# EAGLE board carpcb_v6 (EAGLE 9.7.0)
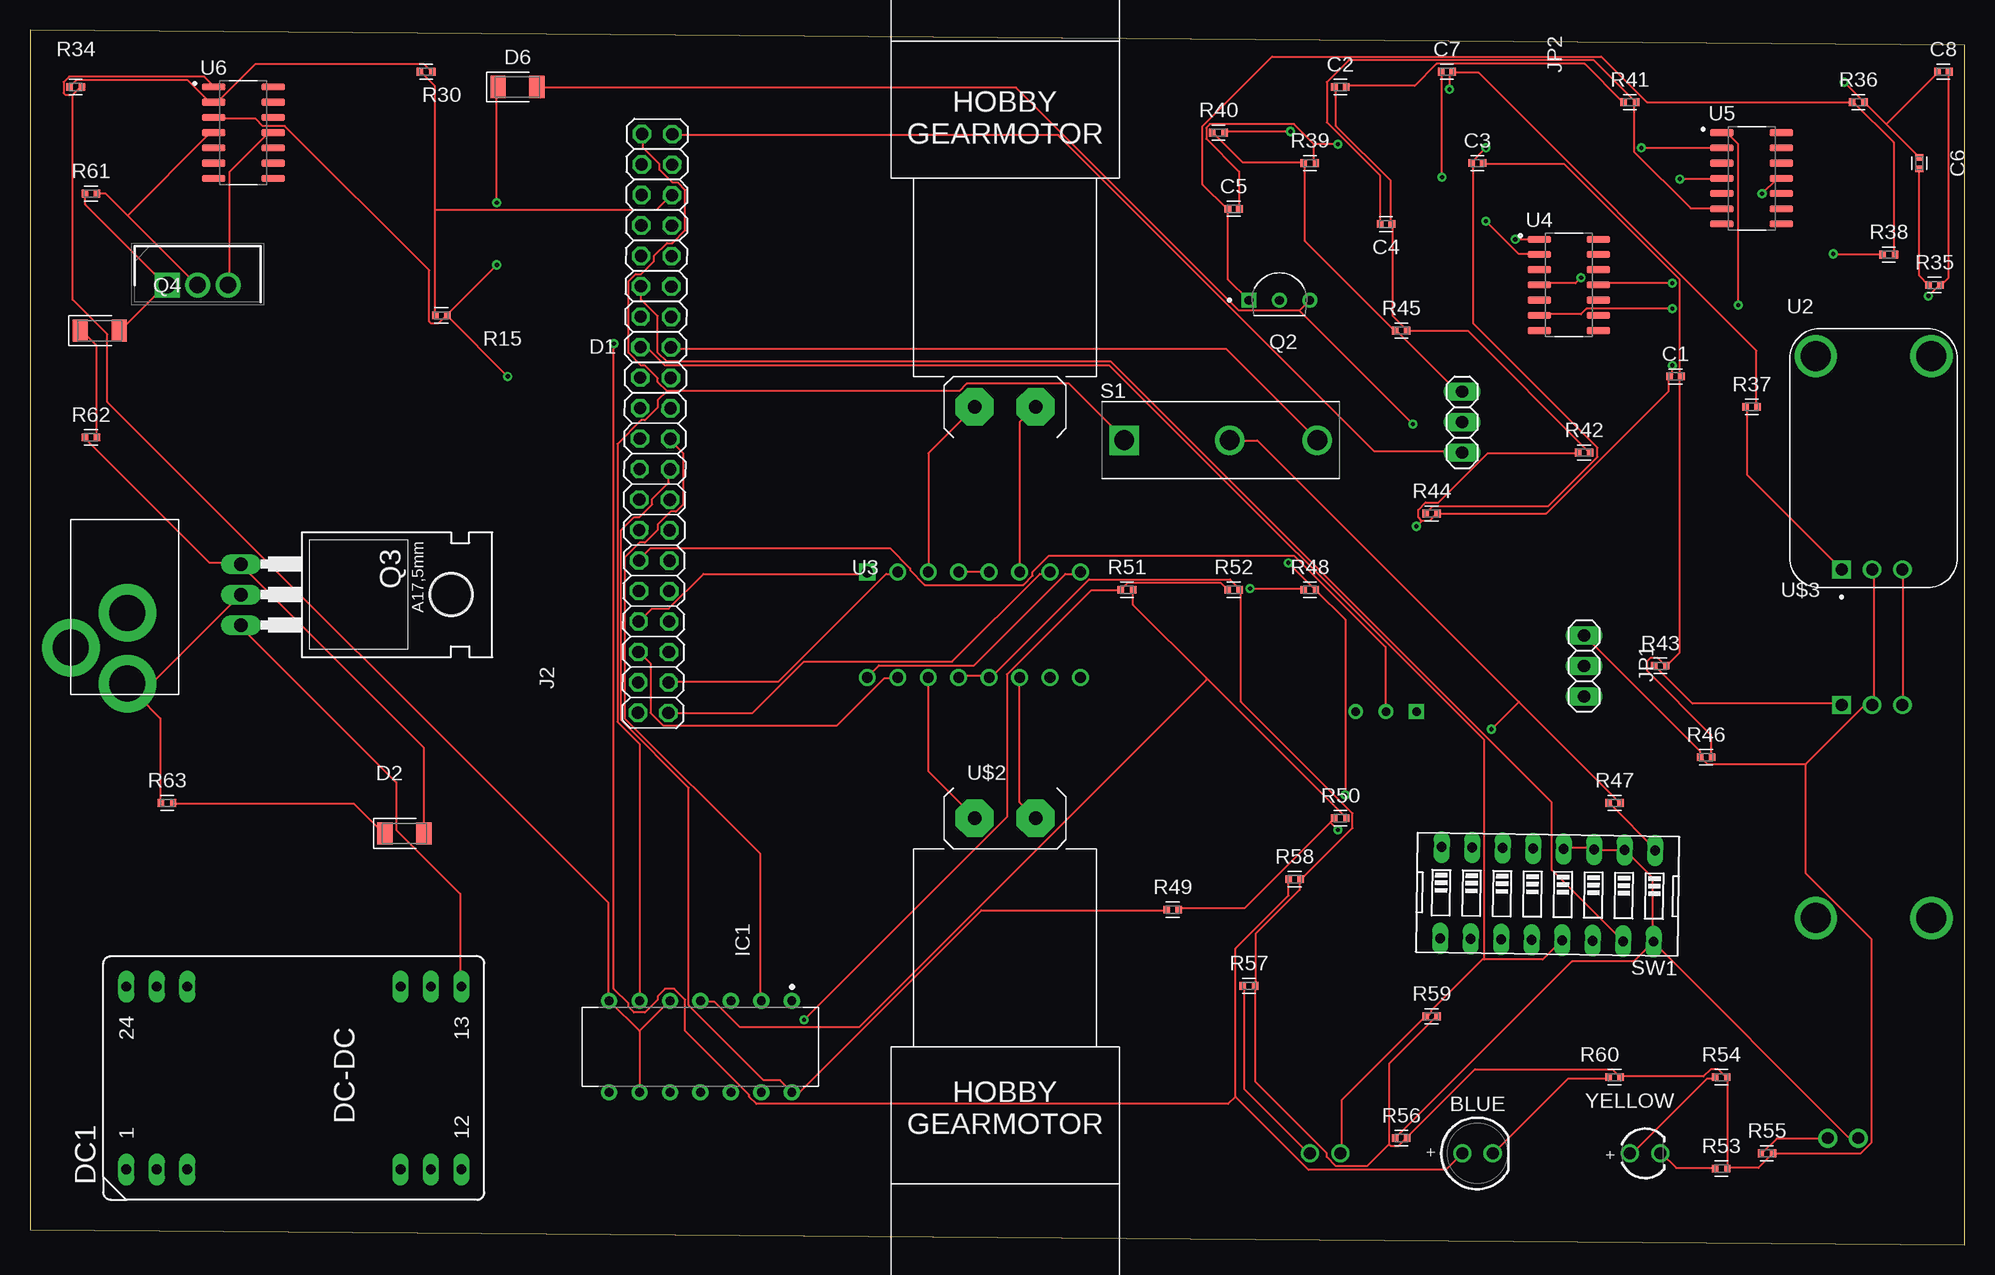
[diagram p0: board, top side]
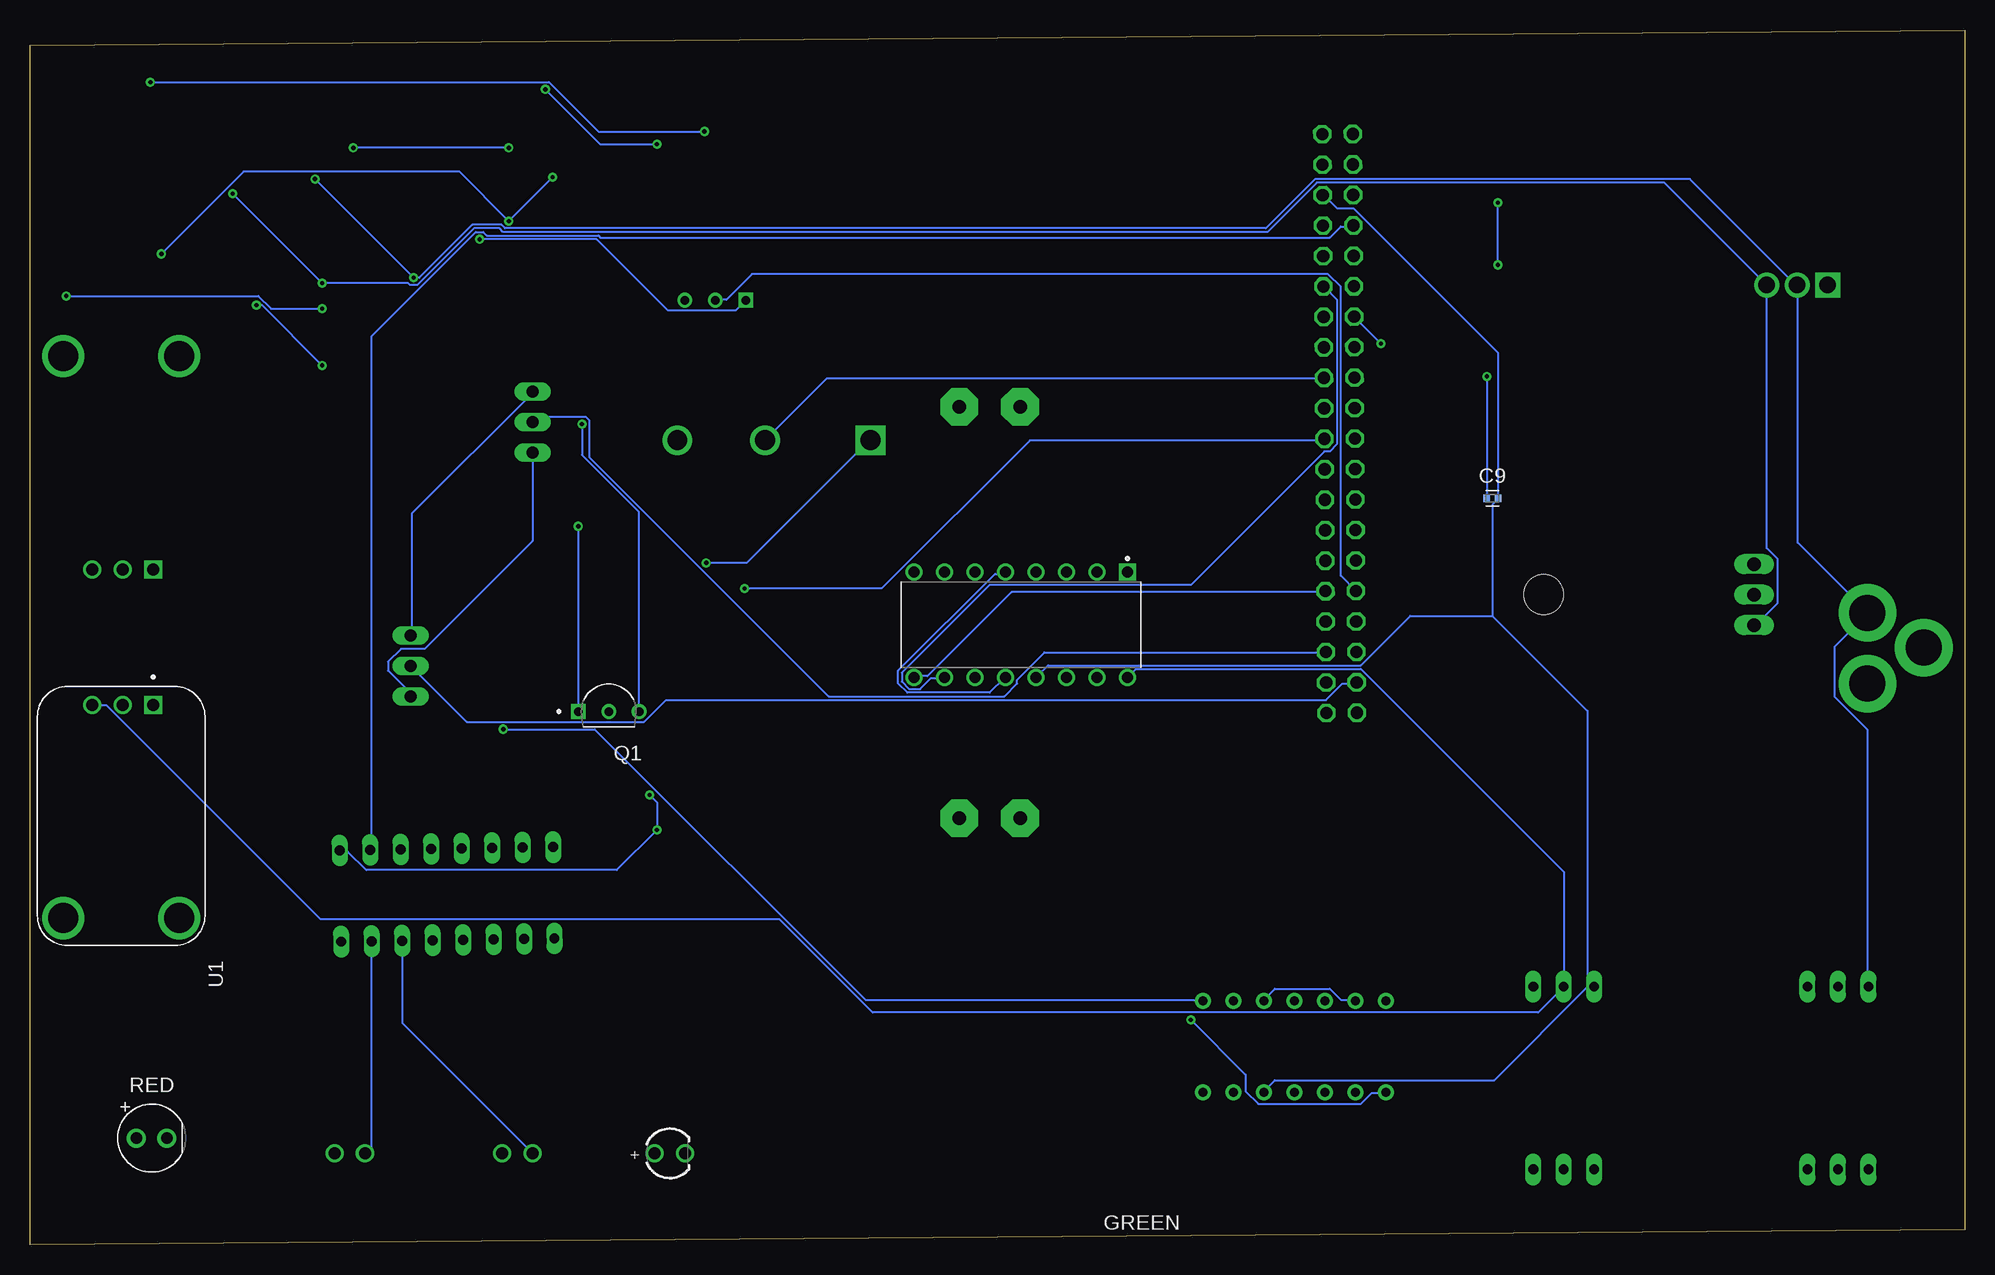
[diagram p1: board, bottom side, seen from below]

Size 161.27 x 101.27 mm. Coordinates in mm from the lower left corner, seen from the top.
Outline: 0,1.27 161.27,0 161.27,100 0,101.27 0,1.27
Copper layers (1*16): Top 0.035mm / dielectric 1.5mm / Bottom 0.035mm
Design rules "Fusion Electronics Design Rules": minimum track width 6mil, minimum drill 0.35mm, track to track 6mil, track to pad 6mil, pad to pad 6mil, via to via 6mil, smd to smd 6mil, copper to edge 40mil, drill to drill 6mil, minimum pad ring 10mil, minimum via ring 8mil, stop-mask expansion 4mil, vias tented up to drill 0mil, thermal gap 10mil

## Footprints (pad centres in the part's own frame; a part is rotated, then mirrored left to right if it is on the bottom)
WL-TMRC_5MM = drill 1: 1 -1.27,0; 2 1.27,0
CAPC1005X60 = smd 0.56 x 0.629: 1 -0.485,0; 2 0.485,0
DIOMELF3516 = smd 1.275 x 1.85: 1 -1.62,0; 2 1.62,0
CMK = drill 0.813 long: 1 -7.62,13.97; 2 -7.62,11.43; 3 -7.62,8.89; 10 -7.62,-8.89; 11 -7.62,-11.43; 12 -7.62,-13.97; 13 7.62,-13.97; 14 7.62,-11.43; 15 7.62,-8.89; 22 7.62,8.89; 23 7.62,11.43; 24 7.62,13.97
WL-TMRC_3MM = drill 1: 1 -1.27,0; 2 1.27,0
DIP762W53P254L1969H508Q14B = drill 0.743 pad 1.343: 1 -3.81,7.62; 2 -3.81,5.08; 3 -3.81,2.54; 4 -3.81,0; 5 -3.81,-2.54; 6 -3.81,-5.08; 7 -3.81,-7.62; 8 3.81,-7.62; 9 3.81,-5.08; 10 3.81,-2.54; 11 3.81,0; 12 3.81,2.54; 13 3.81,5.08; 14 3.81,7.62
2X20 = drill 1.016 octagon: 1 -24.13,-1.27; 2 -24.13,1.27; 3 -21.59,-1.27; 4 -21.59,1.27; 5 -19.05,-1.27; 6 -19.05,1.27; 7 -16.51,-1.27; 8 -16.51,1.27; 9 -13.97,-1.27; 10 -13.97,1.27; 11 -11.43,-1.27; 12 -11.43,1.27; 13 -8.89,-1.27; 14 -8.89,1.27; 15 -6.35,-1.27; 16 -6.35,1.27; 17 -3.81,-1.27; 18 -3.81,1.27; 19 -1.27,-1.27; 20 -1.27,1.27; 21 1.27,-1.27; 22 1.27,1.27; 23 3.81,-1.27; 24 3.81,1.27; 25 6.35,-1.27; 26 6.35,1.27; 27 8.89,-1.27; 28 8.89,1.27; 29 11.43,-1.27; 30 11.43,1.27; 31 13.97,-1.27; 32 13.97,1.27; 33 16.51,-1.27; 34 16.51,1.27; 35 19.05,-1.27; 36 19.05,1.27; 37 21.59,-1.27; 38 21.59,1.27; 39 24.13,-1.27; 40 24.13,1.27
1X03 = drill 1.016 long: 1 -2.54,0; 2 0,0; 3 2.54,0
TO92254P458H750-3 = drill 0.72 square: 1 -2.54,0 | drill 0.72: 2 0,0; 3 2.54,0
TO220BH = drill 1.118 long: D 0,-6.35; G -2.54,-6.35; S 2.54,-6.35 | hole 3.302: 0,11.176
TO254P465X1024X2050-3P = drill 1.39 pad 2.085 square: 1 0,0 | drill 1.39 pad 2.085: 2 2.54,0; 3 5.08,0
RESC1005X40 = smd 0.535 x 0.644: 1 -0.507,0; 2 0.507,0
LEDRD254W60D565H860B_R = drill 0.981 pad 1.581: A -1.27,0; C 1.27,0
SW_MS0850502F030P1A = drill 1.65 square: 1 0,0 | drill 1.65: 2 16.1,0; 3 8.8,0
EDG-08 = drill 0.813 long: 1 -8.89,-3.81; 2 -6.35,-3.81; 3 -3.81,-3.81; 4 -1.27,-3.81; 5 1.27,-3.81; 6 3.81,-3.81; 7 6.35,-3.81; 8 8.89,-3.81; 9 8.89,3.81; 10 6.35,3.81; 11 3.81,3.81; 12 1.27,3.81; 13 -1.27,3.81; 14 -3.81,3.81; 15 -6.35,3.81; 16 -8.89,3.81
MODULE_1063 = drill 1 square: 1 -2.667,-9.271 | drill 1: 2 -0.127,-9.271; 3 2.413,-9.271 | drill 2.5: S1 -4.826,8.509; S2 4.826,8.509
DIP880W50P254L2000H510Q16 = drill 0.9 pad 1.25 square: 1 -4.4,8.89 | drill 0.9 pad 1.25: 2 -4.4,6.35; 3 -4.4,3.81; 4 -4.4,1.27; 5 -4.4,-1.27; 6 -4.4,-3.81; 7 -4.4,-6.35; 8 -4.4,-8.89; 9 4.4,-8.89; 10 4.4,-6.35; 11 4.4,-3.81; 12 4.4,-1.27; 13 4.4,1.27; 14 4.4,3.81; 15 4.4,6.35; 16 4.4,8.89
SOIC127P600X175-14N = smd 1.97 x 0.6: 1 -2.475,3.81; 2 -2.475,2.54; 3 -2.475,1.27; 4 -2.475,0; 5 -2.475,-1.27; 6 -2.475,-2.54; 7 -2.475,-3.81; 8 2.475,-3.81; 9 2.475,-2.54; 10 2.475,-1.27; 11 2.475,0; 12 2.475,1.27; 13 2.475,2.54; 14 2.475,3.81
PJ-102A = drill 3 pad 4.8: RING 0.1,-3.39; RING_SW -4.6,-6.29; TIP 0.1,-9.29
DG01D = drill 1.118 pad 3.15 octagon: + 2.54,0; - -2.54,0

## Placement (x,y rotation side)
BLUE  WL-TMRC_5MM_WITHOUTSTOPPER  [WL-TMRC_5MM]  120.65,7.62 0 top
C1  1  [CAPC1005X60]  137.16,72.39 0 top
C2  1  [CAPC1005X60]  109.22,96.52 0 top
C3  1  [CAPC1005X60]  120.65,90.17 0 top
C4  1  [CAPC1005X60]  113.03,85.09 180 top
C5  1  [CAPC1005X60]  100.33,86.36 0 top
C6  1  [CAPC1005X60]  157.48,90.17 270 top
C7  1  [CAPC1005X60]  118.11,97.79 0 top
C8  1  [CAPC1005X60]  159.49,97.79 0 top
C9  1  [CAPC1005X60]  39.37,62.23 0 bottom
D1  DIODE_DO-213AA(SOD-80)  [DIOMELF3516]  5.81,76.2 0 top
D2  DIODE_DO-213AA(SOD-80)  [DIOMELF3516]  31.21,34.29 0 top
D6  DIODE_DO-213AA(SOD-80)  [DIOMELF3516]  40.64,96.52 0 top
DC1  1  [CMK]  22,13.9 90 top
GREEN  WL-TMRC_3MM_WITHOUTSTOPPER  [WL-TMRC_3MM]  107.95,7.62 0 bottom
IC1  LM339_PDIP  [DIP762W53P254L1969H508Q14B]  55.88,16.51 270 top
J2  PiHeaderM  [2X20]  52.11,68.47 269.6 top
JP1  PINHD-1X3  [1X03]  129.54,48.26 90 top
JP2  PINHD-1X3  [1X03]  119.38,68.58 90 top
Q1  2N7000  [TO92254P458H750-3]  113.03,44.45 0 bottom
Q2  2N7000  [TO92254P458H750-3]  104.14,78.74 0 top
Q3  IRF4905  [TO220BH]  23.92,54.2 270 top
Q4  IRFZ34PBF  [TO254P465X1024X2050-3P]  11.43,80.01 0 top
R15  1  [RESC1005X40]  34.29,77.47 0 top
R30  1  [RESC1005X40]  33.02,97.79 0 top
R34  1  [RESC1005X40]  3.81,96.52 0 top
R35  1  [RESC1005X40]  158.75,80.01 0 top
R36  1  [RESC1005X40]  152.4,95.25 0 top
R37  1  [RESC1005X40]  143.51,69.85 0 top
R38  1  [RESC1005X40]  154.94,82.55 0 top
R39  1  [RESC1005X40]  106.68,90.17 0 top
R40  1  [RESC1005X40]  99.06,92.71 0 top
R41  1  [RESC1005X40]  133.35,95.25 0 top
R42  1  [RESC1005X40]  129.54,66.04 0 top
R43  1  [RESC1005X40]  135.89,48.26 0 top
R44  1  [RESC1005X40]  116.84,60.96 0 top
R45  1  [RESC1005X40]  114.3,76.2 0 top
R46  1  [RESC1005X40]  139.7,40.64 0 top
R47  1  [RESC1005X40]  132.08,36.83 0 top
R48  1  [RESC1005X40]  106.68,54.61 0 top
R49  1  [RESC1005X40]  95.25,27.94 0 top
R50  1  [RESC1005X40]  109.22,35.56 0 top
R51  1  [RESC1005X40]  91.44,54.61 0 top
R52  1  [RESC1005X40]  100.33,54.61 0 top
R53  1  [RESC1005X40]  140.97,6.35 0 top
R54  1  [RESC1005X40]  140.97,13.97 0 top
R55  1  [RESC1005X40]  144.78,7.62 0 top
R56  1  [RESC1005X40]  114.3,8.89 0 top
R57  1  [RESC1005X40]  101.6,21.59 0 top
R58  1  [RESC1005X40]  105.41,30.48 0 top
R59  1  [RESC1005X40]  116.84,19.05 0 top
R60  1  [RESC1005X40]  132.08,13.97 0 top
R61  1  [RESC1005X40]  5.08,87.63 0 top
R62  1  [RESC1005X40]  5.08,67.31 0 top
R63  1  [RESC1005X40]  11.43,36.83 0 top
RED  LED_RADIALRED  [LEDRD254W60D565H860B_R]  151.13,8.89 0 bottom
S1  MS0850502F030P1A  [SW_MS0850502F030P1A]  91.2,67.07 0 top
SW1  1  [EDG-08]  126.5,29.21 179.1 top
U1  1063  [MODULE_1063]  153.67,35.74 180 bottom
U2  1063  [MODULE_1063]  153.67,65.57 0 top
U3  L293D  [DIP880W50P254L2000H510Q16]  78.68,51.68 270 bottom
U4  TL084CD  [SOIC127P600X175-14N]  128.27,80.02 0 top
U5  TL084CD  [SOIC127P600X175-14N]  143.51,88.9 0 top
U6  TL084CD  [SOIC127P600X175-14N]  17.78,92.71 0 top
U$1  2.1MMJACKTHM  [PJ-102A]  8.02,56.07 0 top
U$2  MOTOR_DG01D  [DG01D]  81.28,35.56 0 top
U$3  MOTOR_DG01D  [DG01D]  81.28,69.85 180 top
YELLOW  WL-TMRC_3MM_WITHOUTSTOPPER  [WL-TMRC_3MM]  134.62,7.62 0 top

## Library data of the parts
BLUE = WL-TMRC_5MM; AVAILABILITY: In Stock; CHECK_PRICES: https://www.snapeda.com/parts/151051BS04000/Wurth+Electronics/view-part/?ref=eda; DESCRIPTION: 5mm, Blue Typ.(@20mA): 470nm, 500mcd, 3.2V, 40° GaN; MF: Wurth Electronics; MP: 151051BS04000; PACKAGE: Package; PRICE: None; SNAPEDA_LINK: https://www.snapeda.com/parts/151051BS04000/Wurth+Electronics/view-part/?ref=snap
C1-C9 = Tinkercad; CATEGORY: Capacitor
D1 D2 D6 = Diode; CATEGORY: Diode; DESCRIPTION: Generic diode Surface Mount DO-213AA(SOD-80); PACKAGE_SIZE: SOD-80; PACKAGE_TYPE: SMD; SUBCATEGORY: Rectifiers
DC1 = dc-dc-converter
GREEN = WL-TMRC_3MM; AVAILABILITY: In Stock; CHECK_PRICES: https://www.snapeda.com/parts/151031VS06000/Wurth+Electronics/view-part/?ref=eda; DESCRIPTION: 3mm Bright Green Typ (@20mA) 568nm, 30mcd, 2.2V, 60° GaP/GaP; MF: Wurth Electronics; MP: 151031VS06000; PACKAGE: Radial Würth Elektronik; PRICE: None; SNAPEDA_LINK: https://www.snapeda.com/parts/151031VS06000/Wurth+Electronics/view-part/?ref=snap
IC1 U$2 U$3 = Tinkercad
J2 U$1 = adafruit
JP1 JP2 = Connector; CATEGORY: Headers; DESCRIPTION: Header-Straight-3 Position; PACKAGE_TYPE: THT; PITCH: 0.100" (2.54mm); SUBCATEGORY: Headers-Male Pins; TYPE: Board to Board or Cable-Unshrouded-Through Hole-Straight
Q1 Q2 = 2N7000; AVAILABILITY: In Stock; CHECK_PRICES: https://www.snapeda.com/parts/2N7000/Diotec/view-part/?ref=eda; DESCRIPTION: MOSFET, TO-92, N, 60V, 0.2A, 5Ω, 150°C; MF: Diotec Semiconductor; MP: 2N7000; PACKAGE: TO-92 Diotec; PRICE: None; SNAPEDA_LINK: https://www.snapeda.com/parts/2N7000/Diotec/view-part/?ref=snap
Q3 = IRF4905; AVAILABILITY: Not in stock; CHECK_PRICES: https://www.snapeda.com/parts/IRF4905/Infineon/view-part/?ref=eda; DESCRIPTION: P-Channel 55 V 74A (Tc) 200W (Tc) Through Hole TO-220AB; MF: Infineon Technologies; MP: IRF4905; PACKAGE: TO-220 Infineon; PRICE: None; SNAPEDA_LINK: https://www.snapeda.com/parts/IRF4905/Infineon/view-part/?ref=snap
Q4 = IRFZ34PBF; ARROW_PART_NUMBER: IRFZ34PBF; ARROW_PRICE-STOCK: https://www.arrow.com/en/products/irfz34pbf/vishay?region=nac; DESCRIPTION: Trans MOSFET N-CH 60V 30A; HEIGHT: 4.65mm; MANUFACTURER_NAME: Vishay; MANUFACTURER_PART_NUMBER: IRFZ34PBF; MOUSER_PART_NUMBER: 844-IRFZ34PBF; MOUSER_PRICE-STOCK: https://www.mouser.co.uk/ProductDetail/Vishay-Semiconductors/IRFZ34PBF?qs=I1ZA2VTqfvRg%2FcYzigS1jg%3D%3D
R15 R30 R34-R63 = Resistor; CATEGORY: Resistors; DESCRIPTION: Chip Resistor 1.05 X 0.54 X 0.40 mm body 0402(1005-METRIC) Package; PACKAGE_SIZE: 0402; PACKAGE_TYPE: SMD
RED = Opto-Electronic; CATEGORY: Optoelectronics; COLOR: Red; DESCRIPTION: Radial LED (Round) 2.54 mm pitch 5.65 mm body diameter 8.60 mm body height Red; PACKAGE_SIZE: 5mm; PACKAGE_TYPE: THT; SUBCATEGORY: LED; TYPE: Round
S1 = MS0850502F030P1A; AVAILABILITY: In Stock; CHECK_PRICES: https://www.snapeda.com/parts/MS0850502F030P1A/E-Switch/view-part/?ref=eda; DESCRIPTION: Snap Action Switch, SPDT, ON-MOM, MS Series, Straight Lever, 5A, 125VAC, PC Pin | E-Switch MS0850502F030P1A; MF: E-Switch; MP: MS0850502F030P1A; PACKAGE: None; PRICE: None; SNAPEDA_LINK: https://www.snapeda.com/parts/MS0850502F030P1A/E-Switch/view-part/?ref=snap
SW1 = special
U1 U2 = 1063; AVAILABILITY: In Stock; CHECK_PRICES: https://www.snapeda.com/parts/1063/Adafruit+Industries/view-part/?ref=eda; DESCRIPTION: Electret Microphone Amplifier - MAX4466 with Adjustable Gain | Adafruit Industries 1063; MF: Adafruit; MP: 1063; PACKAGE: None; PRICE: None; SNAPEDA_LINK: https://www.snapeda.com/parts/1063/Adafruit+Industries/view-part/?ref=snap
U3 = L293D; AVAILABILITY: In Stock; CHECK_PRICES: https://www.snapeda.com/parts/L293D/STMicroelectronics/view-part/?ref=eda; DESCRIPTION: Bipolar Motor Driver - Parallel 16-PowerDIP; MF: STMicroelectronics; MP: L293D; PACKAGE: DIP-16 STMicroelectronics; PRICE: None; SNAPEDA_LINK: https://www.snapeda.com/parts/L293D/STMicroelectronics/view-part/?ref=snap
U4-U6 = TL084CD; CHECK_PRICES: https://www.snapeda.com/parts/TL084CD/Texas+Instruments/view-part/?ref=eda; DESCRIPTION: Quad, 30-V, 3-MHz, 13-V/µs slew rate, In to V+, JFET-input op amp; DIGIKEY_PART_NUMBER: 296-1285-5-ND; MF: Texas Instruments; MP: TL084CD; PACKAGE: SOIC-14 Texas Instruments; SNAPEDA_LINK: https://www.snapeda.com/parts/TL084CD/Texas+Instruments/view-part/?ref=snap
YELLOW = WL-TMRC_3MM-2; AVAILABILITY: In Stock; CHECK_PRICES: https://www.snapeda.com/parts/151031YS06000/Wurth+Electronics/view-part/?ref=eda; DESCRIPTION: 3mm, Yellow Typ (@20mA) 590nm, 110mcd, 2.0V, 60° AlInGaP; MF: Wurth Electronics; MP: 151031YS06000; PACKAGE: Radial Würth Elektronik; PRICE: None; SNAPEDA_LINK: https://www.snapeda.com/parts/151031YS06000/Wurth+Electronics/view-part/?ref=snap

## Nets
3V3GPIO*: IC1.3 IC1.6 J2.1 R47.1 R48.2 R49.2 R50.1 S1.1 SW1.1
5VGPIO*: J2.2 JP1.1 JP2.1
GND*GPIO1: C9.2 DC1.15 IC1.12 J2.6 JP1.3 JP2.3 R15.1 R30.1 R39.1 R40.1 R45.1 R46.1 R52.2 R53.2 R54.2 R55.2 R56.2 R57.2 R58.2 R59.2 R60.2 U1.2 U2.2 U3.4 U3.5 U3.12 U3.13
GPIO4*: J2.7 R56.1 RED.A SW1.2 SW1.3 SW1.4 SW1.16
GPIO5*: J2.29 Q1.2
GPIO6*: J2.31 Q2.2
GPIO8*: IC1.14 J2.24 R49.1
GPIO12*: J2.32 U3.9
GPIO13*: J2.33 U3.1
GPIO16*: J2.36 JP2.2
GPIO17*: J2.11 R54.1 SW1.15 YELLOW.1
GPIO18*: J2.12 U3.10
GPIO19*: J2.35 U3.15
GPIO20*: J2.38 U3.2
GPIO21*: J2.40 U3.7
GPIO22*: GREEN.1 J2.15 R59.1 SW1.13
GPIO23*: J2.16 S1.2
GPIO24*: IC1.1 J2.18 R47.2 S1.3
GPIO25*: IC1.2 J2.22 R48.1
GPIO26*: J2.37 JP1.2
GPIO27*: BLUE.1 J2.13 R58.1 SW1.14
N$1: D1.2 Q4.1 R61.1
N$2: D1.1 R62.2
N$3: D2.2 Q3.G R62.1
N$4: D2.1 R63.2
N$5: Q3.D R63.1 U$1.TIP
N$6: U3.11 U$2.+
N$7: U3.3 U$3.+
N$8: C1.2 C3.2 R43.2 R46.2
N$9: DC1.14 U1.3 U2.3 U3.8 U3.16
N$12: C3.1 R44.1 U5.2
N$13: C2.1 C4.1 R42.2 R45.2
N$14: C2.2 R41.1
N$15: C1.1 Q1.1 R42.1 R44.2 U5.1
N$16: C4.2 R41.2 U5.6
N$17: R55.1 RED.C
N$18: R43.1 U1.1
N$19: C5.2 C7.2 R37.2 R39.2
N$20: C7.1 R38.1 U4.2
N$21: C6.1 C8.1 R36.2 R40.2
N$22: C6.2 R35.1
N$23: C5.1 Q2.1 R36.1 R38.2 U4.1
N$24: C8.2 R35.2 U4.6
N$25: R53.1 YELLOW.2
N$26: R37.1 U2.1
N$27: C9.1 D6.1 R15.2 U6.3
N$28: GREEN.2 R57.1
N$29: D6.2 Q1.3 Q2.3
N$30: BLUE.2 R60.1
N$31: IC1.4 R50.2 R51.2
N$32: IC1.8 R51.1 R52.1
N$33: U3.6 U$3.-
N$34: R30.2 R34.1 U6.2
N$35: IC1.5 IC1.7 IC1.9 R34.2 U6.1
N$36: U3.14 U$2.-
VCC+12: DC1.24 Q4.2 R61.2 U4.4 U5.4 U6.4 U$1.RING
VCC-12: DC1.13 Q3.S Q4.3 U4.11 U5.11 U6.11

## Tracks (layer width: path | path; a pad name or v marks a point on that pad's centre or on a via)
3V3GPIO*  (via drill 0.35)
  Top 0.152: R47.1 131.72,36.73 135.53,32.92 SW1.1 | 108.41,35.2 108.71,35.51 R50.1 | 108.41,35.2 101.24,28.04 95.76,28.04 R49.2 | 108.41,35.2 v109.02,34.59 | v104.9,56.84 107.04,54.71 R48.2 107.19,54.56 109.63,52.12 v109.63,37.49 | 53.09,71.17 52.32,71.93 52.32,72.24 51.26,73.3 50.95,73.3 49.89,74.37 49.89,80.31 50.5,80.92 50.95,80.92 52.02,81.99 52.02,82.45 53.09,83.52 53.54,83.52 54.61,84.58 54.61,87.94 54,88.54 53.54,88.54 52.48,89.61 52.48,90.07 51.11,91.44 51.11,92.51 J2.1 | 53.09,71.17 77.47,71.17 78.08,71.78 86.61,71.78 91.19,67.21 S1.1 | 53.09,71.17 52.32,70.41 52.32,69.8 51.26,68.73 50.95,68.73 48.97,66.75 48.97,43.59 50.8,41.76 50.8,20.42 IC1.6
  Bottom 0.152: SW1.1 135.38,32.77 134.77,32.77 133.25,31.24 112.37,31.24 v109.02,34.59 109.02,36.88 v109.63,37.49 | IC1.6 50.8,20.42 52.02,20.42 52.93,21.34 57.51,21.34 58.42,20.42 IC1.3 | v104.9,56.84 101.55,56.84 91.34,67.06 S1.1
5VGPIO*
  Top 0.152: J2.2 53.7,92.51 85.7,92.51 112.06,66.14 119.38,66.14 JP2.1
  Bottom 0.152: JP1.1 129.59,45.72 129.59,46.02 131.42,47.85 131.42,48.62 130.35,49.68 128.37,49.68 119.38,58.67 119.38,65.99 JP2.1
GND*GPIO1
  Top 0.152: 33.73,86.26 33.73,96.62 32.66,97.69 R30.1 | 33.73,86.26 33.73,77.57 R15.1 | 33.73,86.26 52.17,86.26 53.39,87.48 J2.6 | U2.2 153.67,56.24 153.67,45.11 U1.2 153.52,44.96 152.91,44.96 148.03,40.08 | JP1.3 129.59,50.75 139.19,41.15 139.19,40.69 R46.1 139.34,40.54 139.8,40.08 148.03,40.08 | R40.1 98.65,92.66 101.09,90.22 106.12,90.22 R39.1 106.27,90.07 106.27,83.67 113.74,76.2 R45.1 113.89,76.2 118.92,71.17 119.38,71.17 JP2.3 | U3.4 77.47,56.08 79.91,56.08 U3.5 | U3.13 77.47,47.4 79.91,47.4 U3.12 80.06,47.24 88.29,55.47 100.02,55.47 100.79,54.71 R52.2 100.94,54.56 100.94,45.26 110.24,35.97 110.24,34.75 105.97,30.48 R58.2 105.82,30.48 105.82,29.57 102.16,25.91 102.16,21.64 R57.2 102.16,21.49 102.16,13.56 108.1,7.62 108.1,7.32 108.86,6.55 111.45,6.55 113.28,8.38 | 141.48,6.4 144.07,6.4 R55.2 | 141.48,6.4 R53.2 141.48,6.4 | R55.2 | 141.48,6.4 141.48,13.87 R54.2 141.33,14.02 140.72,14.63 140.11,14.63 139.5,14.02 132.64,14.02 R60.2 132.49,14.02 131.88,14.63 120.45,14.63 114.81,8.99 R56.2 114.66,8.84 114.05,8.23 113.44,8.23 113.28,8.38 | 113.28,8.38 113.28,15.09 117.25,19.05 R59.2 | 148.03,40.08 148.03,30.94 153.52,25.45 153.52,8.53 152.6,7.62 R55.2 | R55.2
  Bottom 0.152: 31.45,21.49 30.99,21.49 DC1.15 31.45,21.49 | 31.45,21.49 39.22,13.72 57.51,13.72 58.42,12.8 IC1.12 | J2.6 53.39,87.48 52.32,86.41 50.95,86.41 38.91,74.37 38.91,62.33 C9.2 38.91,62.18 39.37,61.72 39.37,52.43 | 31.45,21.49 31.45,44.5 39.37,52.43 | JP1.3 129.44,50.9 129.44,60.96 119.38,71.02 JP2.3 | U3.5 80.06,55.93 80.82,55.93 88.9,47.85 88.9,46.79 88.14,46.02 81.28,46.02 80.06,47.24 U3.12 | 39.37,52.43 46.23,52.43 50.34,48.31 76.4,48.31 77.32,47.4 U3.13
GPIO4*
  Top 0.152: R56.1 113.89,8.99 128.52,23.62 133.71,23.62 135.23,25.15 SW1.16 | RED.A 152.3,8.99 151.54,8.99 135.38,25.15 SW1.16 | SW1.4 127.91,33.07 130.35,33.07 SW1.3 130.51,32.92 132.79,32.92 SW1.2 132.94,32.92 135.23,30.63 135.23,25.3 SW1.16
  Bottom 0.152: J2.7 51.11,84.89 52.02,84.89 52.93,83.97 113.74,83.97 113.89,84.12 123.19,84.12 123.49,84.43 124.1,84.43 132.79,75.74 132.79,33.07 SW1.2
GPIO5*
  Top 0.152: Q1.2 112.98,44.5 112.98,49.84 105.36,57.45 84.94,57.45 83.57,56.08 83.57,55.78 82.8,55.02 74.57,55.02 73.35,56.24 73.35,56.39 71.68,58.06 51.71,58.06 50.8,57.15 J2.29
GPIO6*
  Bottom 0.152: Q2.2 104.14,78.79 103.23,78.79 101.09,80.92 53.09,80.92 52.02,79.86 52.02,55.78 50.8,54.56 J2.31
GPIO8*
  Top 0.152: R49.1 94.69,27.89 79.3,27.89 64.21,12.8 63.6,12.8 IC1.14 63.45,12.8 62.54,13.72 61.16,13.72 54.92,19.96 54.92,38.1 49.28,43.74 49.28,59.59 50.34,60.66 50.8,60.66 51.87,61.72 51.87,62.18 53.24,63.55 53.24,64.62 J2.24
GPIO12*
  Bottom 0.152: U3.9 87.53,47.4 86.46,47.4 79.45,54.41 53.39,54.41 J2.32
GPIO13*
  Top 0.152: U3.1 69.7,55.93 56.13,55.93 53.24,53.03 51.87,53.03 50.8,51.97 J2.33
GPIO16*
  Bottom 0.152: JP2.2 118.92,69.04 114.96,69.04 114.66,68.73 114.66,65.68 94.69,45.72 80.06,45.72 78.99,46.79 78.99,47.09 76.71,49.38 53.39,49.38 J2.36
GPIO17*
  Top 0.152: R54.1 140.41,13.87 139.8,13.87 133.55,7.62 133.4,7.62 YELLOW.1 | J2.11 50.95,79.86 50.95,78.79 52.32,77.42 52.32,74.37 53.09,73.61 90.12,73.61 126.85,36.88 126.85,31.24 132.64,25.45 SW1.15
  Bottom 0.152: SW1.15 132.79,8.08 133.25,7.62 YELLOW.1
GPIO18*
  Bottom 0.152: U3.10 85.09,47.24 86.16,47.24 87.07,46.33 87.99,46.33 88.59,46.94 88.59,47.7 81.28,55.02 64.52,55.02 53.39,66.14 52.93,66.14 52.32,66.75 52.32,78.79 53.39,79.86 J2.12
GPIO19*
  Top 0.152: U3.15 72.29,47.24 71.22,47.24 67.26,43.28 52.78,43.28 51.71,44.35 51.71,48.46 50.8,49.38 J2.35
GPIO20*
  Top 0.152: U3.2 72.29,55.93 71.37,55.93 62.38,46.94 53.24,46.94 J2.38
GPIO21*
  Top 0.152: U3.7 84.94,55.93 84.18,55.93 76.86,48.62 64.52,48.62 60.25,44.35 53.24,44.35 J2.40
GPIO22*
  Top 0.152: 121.21,23.77 126.09,23.77 127.61,25.3 SW1.13 | 121.21,23.77 121.06,23.77 116.79,19.51 116.79,19.36 116.48,19.05 R59.1 | R59.1 109.32,12.04 109.32,7.62 GREEN.1 | R59.1 | 121.21,23.77 121.21,42.06 89.97,73.3 52.93,73.3 51.56,74.68 50.95,74.68 J2.15
GPIO23*
  Top 0.152: J2.16 53.54,74.68 99.72,74.68 107.19,67.21 S1.2
GPIO24*  (via drill 0.35)
  Top 0.152: 124.1,45.26 102.31,67.06 100.02,67.06 S1.3 | 124.1,45.26 132.49,36.88 R47.2 | 124.1,45.26 v121.82,42.98
  Bottom 0.152: v121.82,42.98 114.2,42.98 91.64,20.42 63.6,20.42 IC1.1 | J2.18 53.54,72.24 94.84,72.24 99.87,67.21 S1.3
GPIO25*  (via drill 0.35)
  Top 0.152: v101.7,54.71 106.12,54.71 R48.1 | IC1.2 60.86,20.42 60.86,32.61 49.58,43.89 49.58,57.3 50.8,58.52 51.26,58.52 52.32,59.59 52.32,60.05 53.39,61.11 53.85,61.11 54.46,61.72 54.46,65.99 53.39,67.06 J2.22
  Bottom 0.152: v101.7,54.71 90.27,54.71 77.93,67.06 53.39,67.06 J2.22
GPIO26*
  Bottom 0.152: J2.37 50.8,46.79 51.87,46.79 53.24,45.41 108.25,45.41 110.08,43.59 124.87,43.59 129.44,48.16 JP1.2
GPIO27*  (via drill 0.35)
  Top 0.152: R58.1 104.9,29.11 100.48,24.69 100.48,12.34 | 100.48,12.34 106.58,6.25 118.01,6.25 BLUE.1 | R58.1 | v48.67,75.13 48.67,21.34 49.89,20.12 49.89,19.81 50.34,19.36 51.26,19.36 52.32,20.42 52.32,20.73 52.93,21.34 53.7,21.34 54.61,20.42 54.61,17.83 59.94,12.5 59.94,12.34 60.55,11.73 99.87,11.73 100.48,12.34
  Bottom 0.152: BLUE.1 130.2,18.44 130.2,25.3 SW1.14 | v48.67,75.13 50.8,77.27 J2.13
N$1
  Top 0.152: 11.33,80.01 4.62,86.72 4.62,87.63 R61.1 | 11.33,80.01 Q4.1 11.33,80.01 | 11.33,80.01 7.52,76.2 D1.2
N$2
  Top 0.152: R62.2 5.54,67.36 5.54,74.98 4.32,76.2 D1.1
N$3
  Top 0.152: R62.1 4.62,67.21 14.99,56.84 17.42,56.84 Q3.G 17.58,56.69 32.82,41.45 32.82,34.29 D2.2
N$4
  Top 0.152: R63.2 11.94,36.73 27.03,36.73 29.46,34.29 D2.1
N$5
  Top 0.152: 9.04,45.72 8.13,46.63 U$1.TIP 9.04,45.72 | 9.04,45.72 10.87,43.89 10.87,36.88 R63.1 | 9.04,45.72 17.42,54.1 Q3.D
N$6
  Top 0.152: U3.11 82.5,47.24 82.5,36.88 83.72,35.66 U$2.+
N$7
  Top 0.152: U3.3 74.88,65.99 78.69,69.8 U$3.+
N$8
  Top 0.152: 137.52,72.39 137.52,49.38 136.45,48.31 R43.2 136.3,48.31 135.69,48.92 135.08,48.92 134.77,48.62 134.77,47.85 140.11,42.52 140.11,40.69 R46.2 | 137.52,72.39 C1.2 137.52,72.39 | 137.52,72.39 137.52,80.47 127.91,90.07 121.21,90.07 C3.2
N$9
  Top 0.152: U1.3 156.11,45.11 156.11,56.24 U2.3 | U3.8 87.53,55.93 86.31,55.93 78.69,48.31 70.76,48.31 69.85,47.4 U3.16
  Bottom 0.152: U3.16 69.7,47.4 69.09,48.01 50.34,48.01 33.43,31.09 33.43,21.64 DC1.14 33.43,21.49 35.56,19.36 91.03,19.36 98.81,27.13 137.06,27.13 154.89,44.96 155.96,44.96 U1.3
N$12  (via drill 0.35)
  Top 0.152: R44.1 116.94,61.57 126.54,61.57 130.66,65.68 130.66,66.45 120.29,76.81 120.29,90.07 C3.1 120.14,90.22 v121.36,91.44 | R44.1 | v134.31,91.44 141.02,91.44 U5.2
  Bottom 0.152: v121.36,91.44 v134.31,91.44
N$13
  Top 0.152: R45.2 113.59,77.42 113.59,85.04 C4.1 113.44,85.19 113.44,88.7 108.86,93.27 108.86,96.47 C2.1 | R45.2 | R45.2 119.84,76.2 129.9,66.14 R42.2
N$14
  Top 0.152: C2.2 109.78,96.62 115.42,96.62 117.25,98.45 129.59,98.45 132.79,95.25 R41.1
N$15  (via drill 0.35)
  Top 0.152: 116.03,60.35 115.72,60.66 115.72,61.27 116.33,61.87 117.4,61.87 121.51,65.99 128.98,65.99 R42.1 | 116.03,60.35 116.64,60.35 117.25,60.96 R44.2 117.4,60.96 126.39,60.96 136.6,71.17 136.6,72.39 C1.1 136.75,72.39 136.91,72.54 v136.91,73.3 | v142.39,78.33 142.39,91.75 141.48,92.66 141.17,92.66 U5.1 | 116.03,60.35 v115.57,59.89
  Bottom 0.152: v142.39,78.33 141.94,78.33 v136.91,73.3 | v115.57,59.89 115.57,44.5 Q1.1
N$16
  Top 0.152: R41.2 130.35,98.75 109.93,98.75 108.1,96.93 108.1,93.57 112.52,89.15 112.52,85.19 C4.2 | R41.2 | U5.6 141.02,86.41 138.43,86.41 133.71,91.14 133.71,95.25 R41.2
N$17
  Top 0.152: R55.1 144.37,7.62 145.59,8.84 149.86,8.84 RED.C
N$18
  Top 0.152: R43.1 135.53,48.16 138.58,45.11 150.93,45.11 U1.1
N$19  (via drill 0.35)
  Top 0.152: 107.04,91.75 105.36,93.42 98.35,93.42 98.04,93.12 98.04,92.2 100.79,89.46 100.79,86.41 C5.2 | 107.04,91.75 107.04,90.22 R39.2 | R37.2 143.92,69.95 143.92,74.52 120.75,97.69 118.62,97.69 C7.2 118.47,97.69 118.31,97.54 v118.31,96.32 | v109.02,91.75 107.04,91.75
  Bottom 0.152: v109.02,91.75 113.74,91.75 v118.31,96.32
N$20  (via drill 0.35)
  Top 0.152: v117.7,89 117.7,97.69 C7.1 | v121.36,85.34 124.1,82.6 125.78,82.6 U4.2 | v150.32,82.6 154.43,82.6 R38.1
  Bottom 0.152: v117.7,89 v121.36,85.34 125.48,89.46 143.46,89.46 v150.32,82.6
N$21  (via drill 0.35)
  Top 0.152: R36.2 154.74,93.42 | 154.74,93.42 157.48,90.68 C6.1 | R36.2 | 154.74,93.42 159,97.69 C8.1 | v105.05,92.81 99.57,92.81 R40.2 | R36.2 v151.23,96.93
  Bottom 0.152: v105.05,92.81 113.89,92.81 118.01,96.93 v151.23,96.93
N$22
  Top 0.152: R35.1 157.48,80.77 157.48,89.61 C6.2 | R35.1
N$23  (via drill 0.35)
  Top 0.152: R38.2 155.35,82.6 155.35,91.9 151.99,95.25 R36.1 151.84,95.25 134.77,95.25 130.96,99.06 103.53,99.06 97.74,93.27 97.74,88.39 99.72,86.41 C5.1 99.87,86.26 99.87,80.47 101.55,78.79 Q2.1 | v123.8,83.82 125.78,83.82 U4.1
  Bottom 0.152: v123.8,83.82 114.05,83.82 108.1,77.88 102.46,77.88 101.7,78.64 Q2.1
N$24  (via drill 0.35)
  Top 0.152: C8.2 159.92,97.69 159.92,80.62 159.31,80.01 R35.2 159.16,80.01 v158.24,79.1 | v136.91,78.03 129.74,78.03 129.29,77.57 125.93,77.57 U4.6
  Bottom 0.152: v136.91,78.03 141.17,78.03 142.24,79.1 v158.24,79.1
N$25
  Top 0.152: R53.1 140.41,6.4 137.21,6.4 135.99,7.62 YELLOW.2
N$26
  Top 0.152: R37.1 143.15,69.8 143.15,64.16 150.93,56.39 U2.1
N$27  (via drill 0.35)
  Top 0.152: v39.83,72.39 34.8,77.42 R15.2 | v38.91,86.87 38.91,96.47 D6.1 | v38.91,81.69 34.8,77.57 R15.2 | U6.3 15.44,93.88 18.8,93.88 19.41,93.27 21.23,93.27 33.27,81.23 33.27,76.96 33.43,76.81 34.04,76.81 34.65,77.42 R15.2
  Bottom 0.152: v39.83,72.39 39.83,62.33 C9.1 | v38.91,81.69 v38.91,86.87
N$28
  Top 0.152: R57.1 101.24,21.49 101.24,12.95 106.58,7.62 GREEN.2
N$29  (via drill 0.35)
  Top 0.152: 105.82,77.88 100.79,77.88 82.19,96.47 42.27,96.47 D6.2 | 105.82,77.88 106.58,78.64 Q2.3 | 105.82,77.88 v115.27,68.43
  Bottom 0.152: v115.27,68.43 115.27,65.84 110.54,61.11 110.54,44.5 Q1.3
N$30
  Top 0.152: R60.1 131.57,13.87 128.22,13.87 121.97,7.62 BLUE.2
N$31
  Top 0.152: 98.04,47.24 109.63,35.66 R50.2 | 98.04,47.24 91.95,53.34 91.95,54.56 R51.2 | 98.04,47.24 98.04,47.09 69.09,18.14 59.18,18.14 57.05,20.27 55.98,20.27 IC1.4
N$32  (via drill 0.35)
  Top 0.152: R52.1 99.72,54.71 99.26,55.17 91.49,55.17 91.03,54.71 R51.1 90.88,54.56 88.44,54.56 81.43,47.55 81.43,35.66 v64.52,18.75
  Bottom 0.152: v64.52,18.75 59.94,14.17 59.94,12.8 58.88,11.73 50.34,11.73 49.43,12.65 48.36,12.65 IC1.8
N$33
  Top 0.152: U3.6 82.5,68.58 83.72,69.8 U$3.-
N$34
  Top 0.152: R34.1 3.4,96.62 3.86,97.08 13.16,97.08 14.99,95.25 15.29,95.25 U6.2 15.44,95.25 15.6,95.25 18.8,98.45 32.82,98.45 33.43,97.84 R30.2
N$35
  Top 0.152: 3.56,95.86 4.17,96.47 R34.2 | 3.56,95.86 2.95,95.86 2.79,96.01 2.79,96.93 3.25,97.38 14.53,97.38 15.29,96.62 U6.1 | 50.8,17.83 50.8,12.8 IC1.9 | 50.8,17.83 48.36,20.27 IC1.7 48.21,20.42 48.21,28.5 6.45,70.26 6.45,75.89 3.56,78.79 3.56,95.86 | 50.8,17.83 53.24,20.27 IC1.5
N$36
  Top 0.152: U3.14 74.88,47.24 74.88,39.47 78.69,35.66 U$2.-
VCC+12  (via drill 0.35)
  Top 0.152: v129.29,80.62 128.83,80.16 125.93,80.16 U4.4 | v137.52,88.85 141.02,88.85 U5.4 | 8.13,85.8 13.92,80.01 Q4.2 | 8.13,85.8 6.3,87.63 5.69,87.63 R61.2 | 8.13,85.8 14.99,92.66 15.29,92.66 U6.4
  Bottom 0.152: v137.52,88.85 v129.29,80.62 128.83,80.62 124.41,85.04 121.97,85.04 121.67,84.73 58.27,84.73 54.15,88.85 22.91,88.85 14.07,80.01 Q4.2 13.92,80.01 13.92,58.52 8.13,52.73 U$1.RING 8.13,52.58 10.87,49.84 10.87,45.72 8.13,42.98 8.13,21.64 DC1.24
VCC-12  (via drill 0.35)
  Top 0.152: v136.91,80.16 130.81,80.16 U4.11 | v144.37,87.63 145.59,88.85 145.9,88.85 U5.11 | Q4.3 16.66,80.16 16.66,89.46 19.86,92.66 20.17,92.66 U6.11 | DC1.13 35.87,21.64 35.87,29.26 30.53,34.59 30.53,38.56 17.58,51.51 Q3.S
  Bottom 0.152: v144.37,87.63 v136.91,80.16 129.74,80.16 129.59,80.01 128.98,80.01 124.26,84.73 122.12,84.73 121.82,84.43 58.12,84.43 54,88.54 25.04,88.54 Q4.3 16.51,58.06 15.6,57.15 15.6,53.49 17.42,51.66 Q3.S